# Altium PCB PWM_Controller_Half_Bridge_IR2110.PcbDoc
Units mm, origin at the board's own origin, x right, y up, seen from the top; angles counter-clockwise.
Board outline 60 x 30 mm, 2 copper layers (Top Layer, Bottom Layer), stack 1.071 mm thick; 68 components, 25 nets, 157 pads, 22 vias.
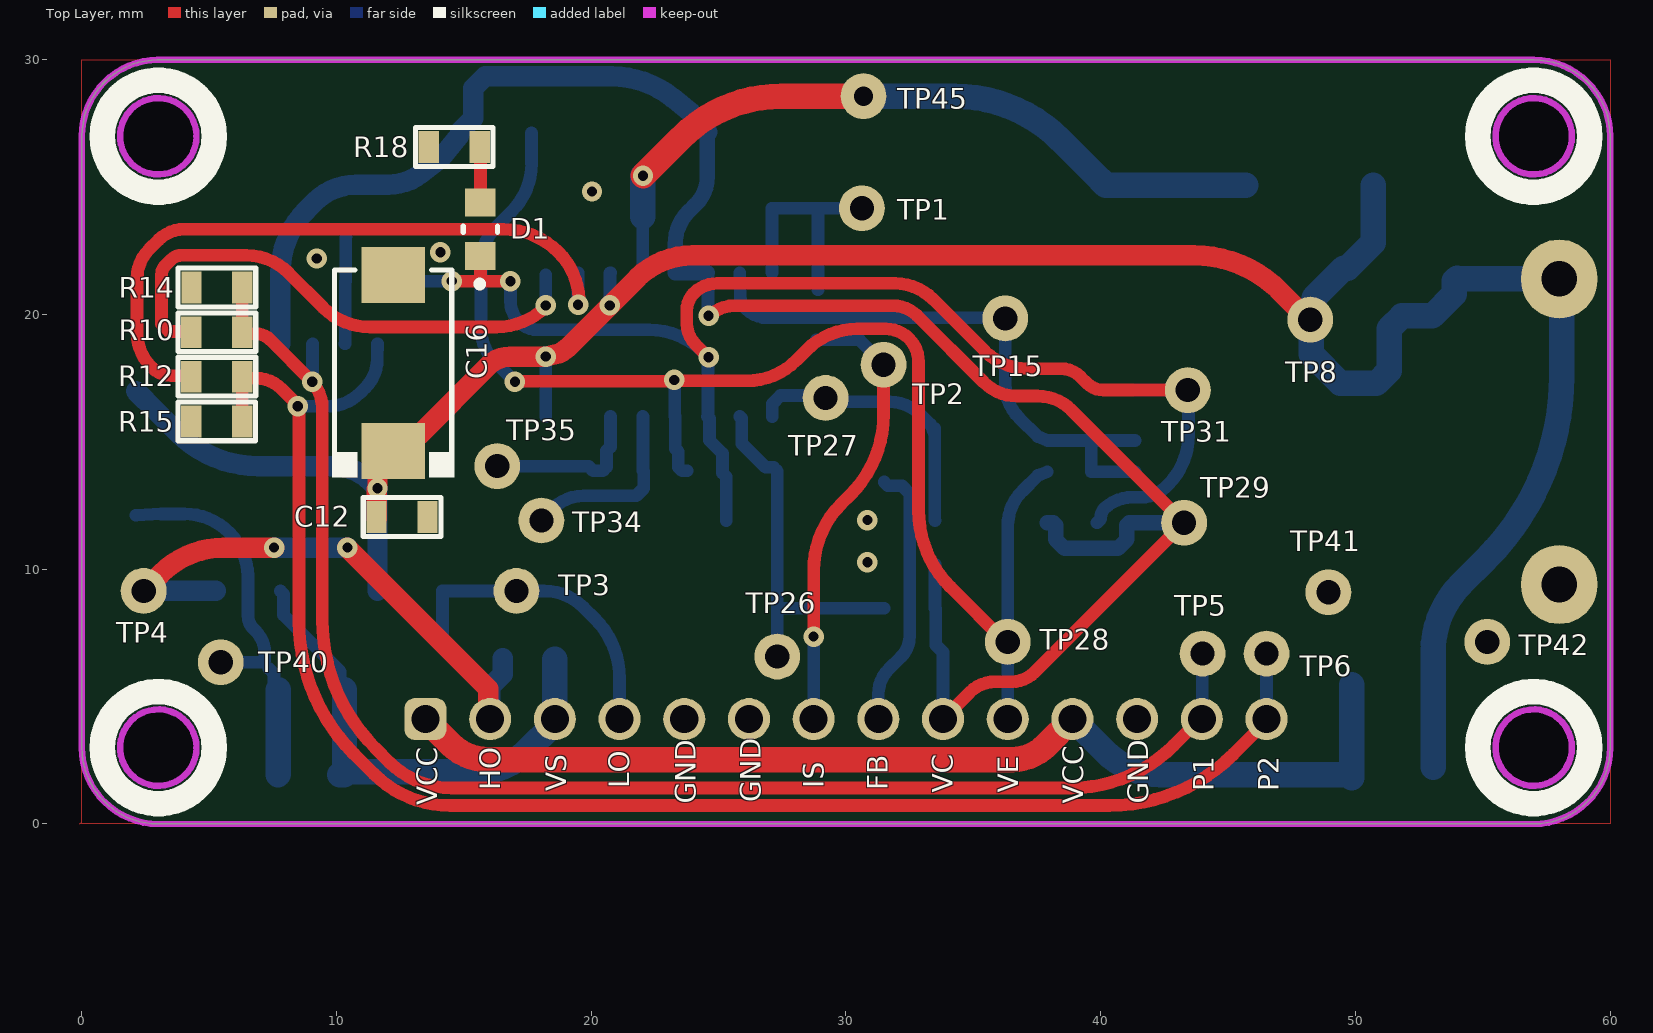
[diagram p0: Top Layer view]
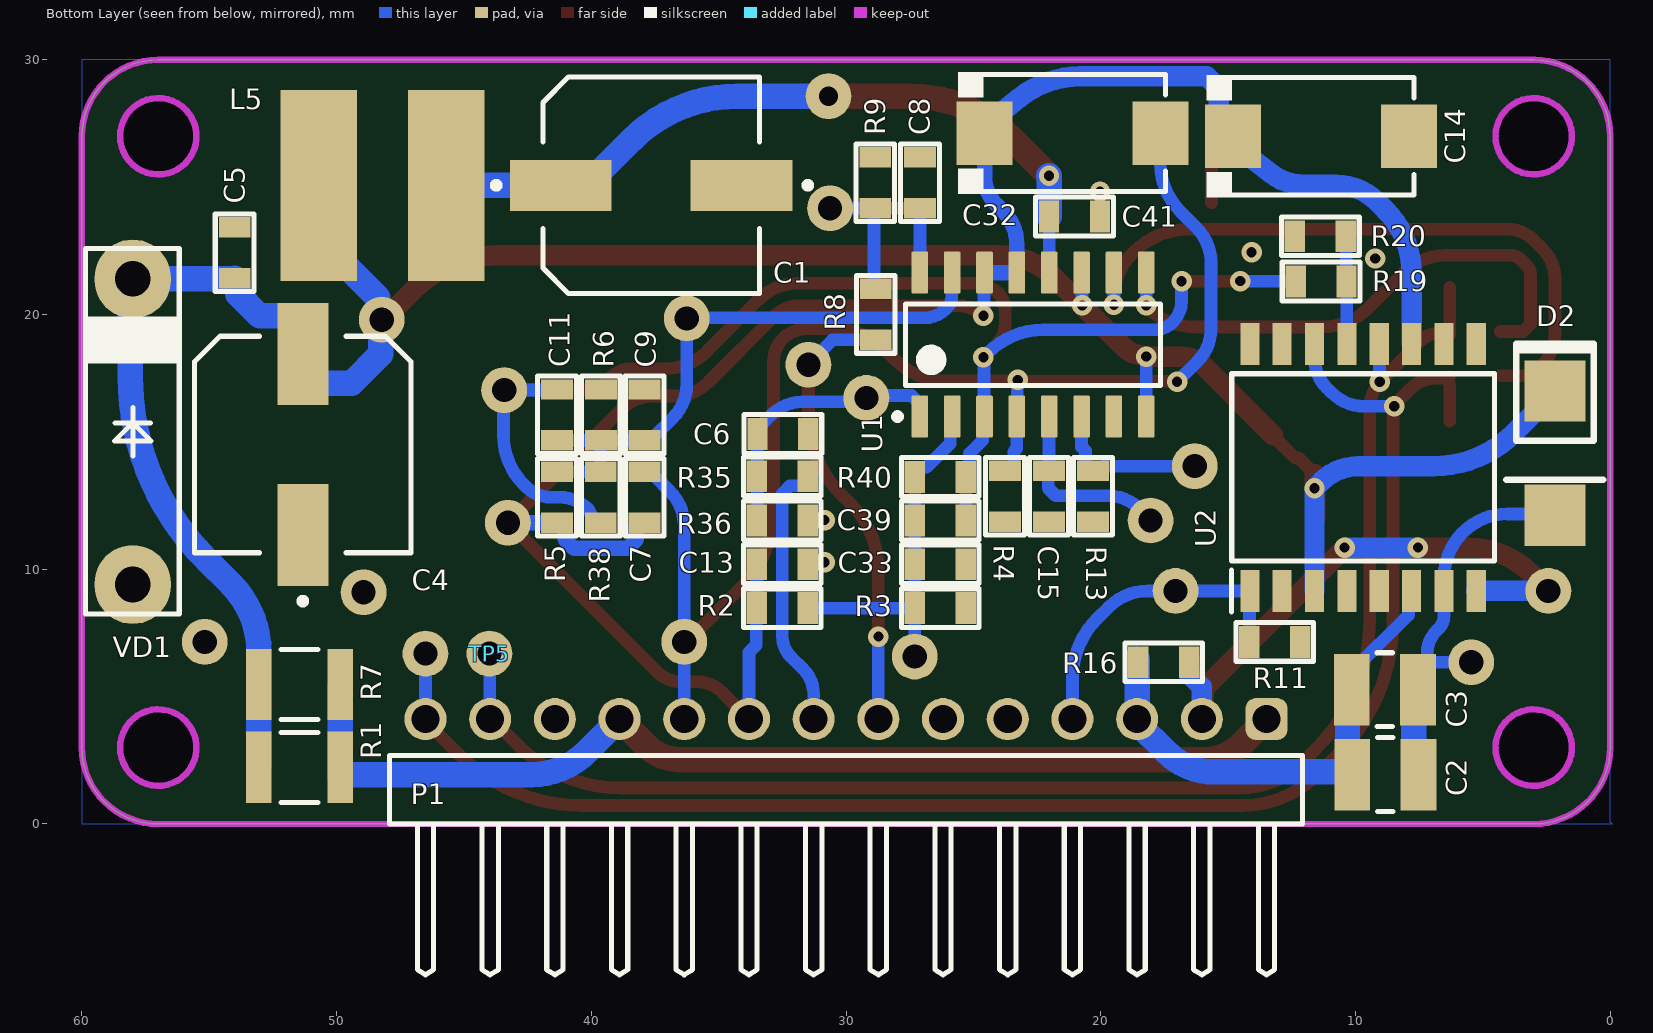
[diagram p1: Bottom Layer view, seen from below]
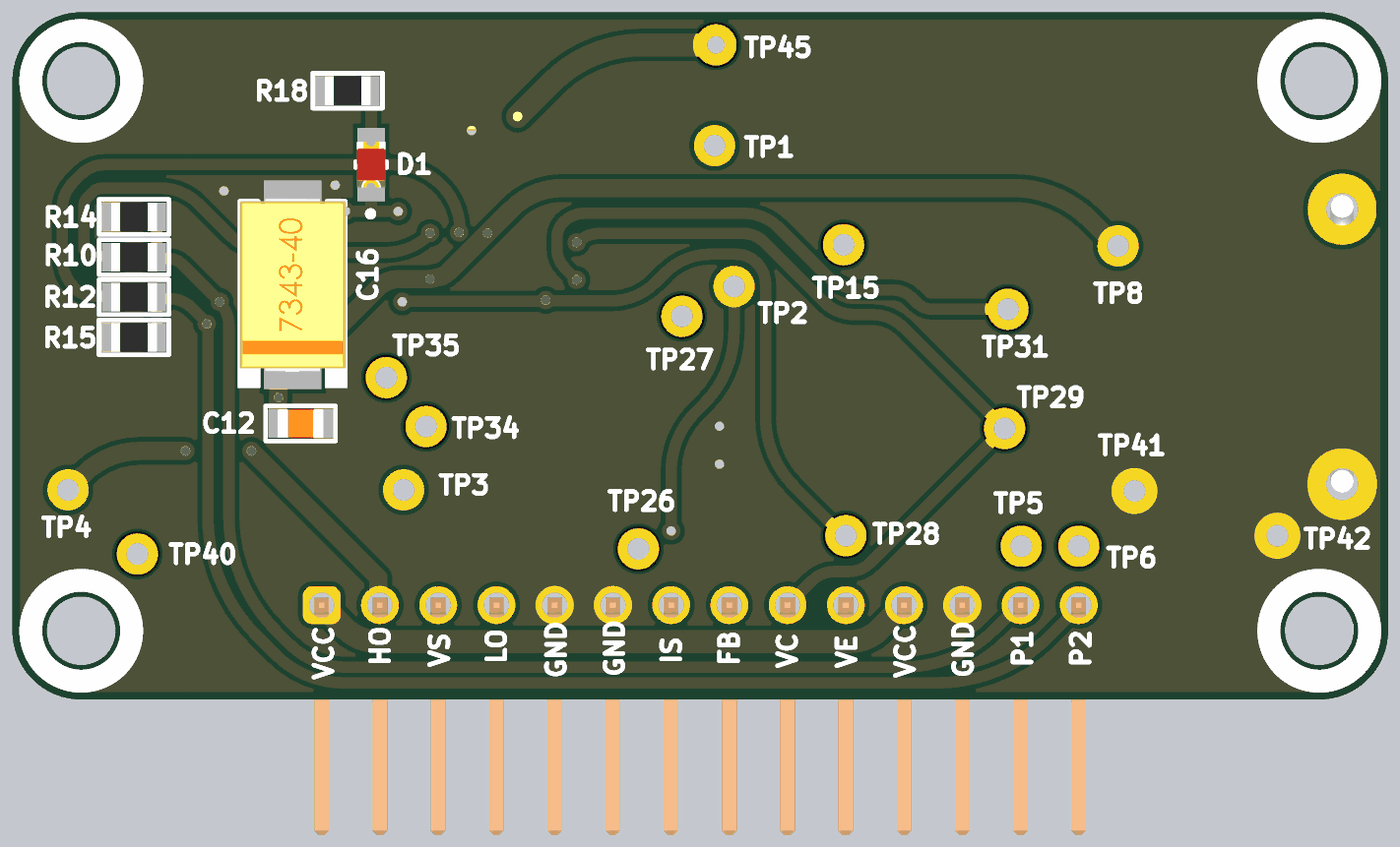
[diagram p2: 3D render of the assembled board from above, using the file's embedded part models]
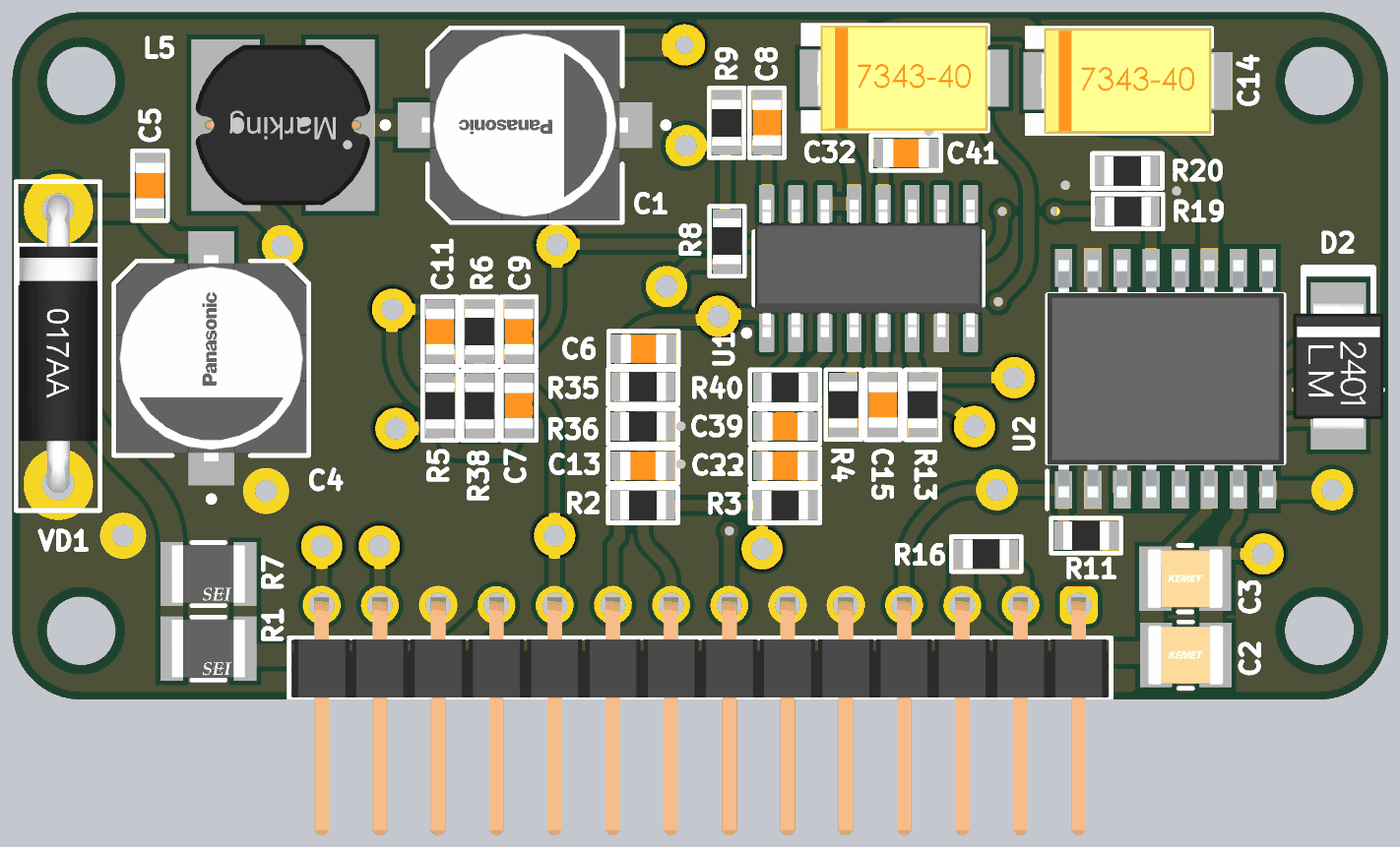
[diagram p3: 3D render of the assembled board from below, using the file's embedded part models]

## Layer stack, top to bottom
Top Solder: solder mask 0.0102, Solder Resist, Dk 3.5
Top Layer: signal copper 0.0356
Dielectric 1: dielectric 1, FR-4, Dk 4.8
Bottom Layer: signal copper 0.0356
Bottom Solder: solder mask 0.0102, Solder Resist, Dk 3.5

## Board outline
0,3 0,27 cw(c3,27) 3,30 2.963,30 57,30 cw(c57,27) 60,27 60,3.05 60,3 cw(c57,3) 57,0 2.999,0 3,0 cw(c3,3)
cut-out: 55.5,3 ccw(c57,3) 57,1.5 ccw(c57,3) 58.5,3 ccw(c57,3) 57,4.5 ccw(c57,3)
cut-out: 55.5,27 ccw(c57,27) 57,25.5 ccw(c57,27) 58.5,27 ccw(c57,27) 57,28.5 ccw(c57,27)
cut-out: 1.5,27 ccw(c3,27) 3,25.5 ccw(c3,27) 4.5,27 ccw(c3,27) 3,28.5 ccw(c3,27)
cut-out: 1.5,3 ccw(c3,3) 3,1.5 ccw(c3,3) 4.5,3 ccw(c3,3) 3,4.5 ccw(c3,3)

## Design rules (kind name [scope] priority, off if disabled: settings)
Clearance Clearance_1 [All vs InNet('GND_1')] p1: gap=0.2 ignorepadtopadclearanceinfootprint=FALSE
Clearance [All vs InNet('GND')] p2: gap=0.2 ignorepadtopadclearanceinfootprint=FALSE except(0.4: Fill-Fill Fill-Poly Fill-Region Fill-Text Fill-Hole Poly-Poly Poly-Region Poly-Text Poly-Hole Region-Region Region-Text Region-Hole)
ComponentClearance [All] p1: gap=-3 collisioncheckmode=3 verticalgap=0.254 showdistances=FALSE
DiffPairsRouting [All] p1: maxlimit=0.254 minlimit=0.254 mostfreqgap=0.254 substack1={A23D90DD-733B-49C5-8102-56B3D284E3A0} toplayer_{a23d90dd-733b-49c5-8102-56b3d284e3a0}_minwidth=0.381 toplayer_{a23d90dd-733b-49c5-8102-56b3d284e3a0}_maxwidth=0.381 toplayer_{a23d90dd-733b-49c5-8102-56b3d284e3a0}_prefwidth=0.381 bottomlayer_{a23d90dd-733b-49c5-8102-56b3d284e3a0}_minwidth=0.381 bottomlayer_{a23d90dd-733b-49c5-8102-56b3d284e3a0}_maxwidth=0.381 bottomlayer_{a23d90dd-733b-49c5-8102-56b3d284e3a0}_prefwidth=0.381 toplayer_minwidth=0.381 toplayer_maxwidth=0.381 toplayer_prefwidth=0.381 bottomlayer_minwidth=0.381 bottomlayer_maxwidth=0.381 bottomlayer_prefwidth=0.381 substack2={0B3DB408-A969-412D-8C07-BA8AE97219D9} toplayer_{0b3db408-a969-412d-8c07-ba8ae97219d9}_minwidth=0.381 toplayer_{0b3db408-a969-412d-8c07-ba8ae97219d9}_maxwidth=0.381 toplayer_{0b3db408-a969-412d-8c07-ba8ae97219d9}_prefwidth=0.381 bottomlayer_{0b3db408-a969-412d-8c07-ba8ae97219d9}_minwidth=0.381 bottomlayer_{0b3db408-a969-412d-8c07-ba8ae97219d9}_maxwidth=0.381 bottomlayer_{0b3db408-a969-412d-8c07-ba8ae97219d9}_prefwidth=0.381 substack3={378827E6-B38F-4565-9D2F-710D8D441C30} toplayer_{378827e6-b38f-4565-9d2f-710d8d441c30}_minwidth=0.381 toplayer_{378827e6-b38f-4565-9d2f-710d8d441c30}_maxwidth=0.381 toplayer_{378827e6-b38f-4565-9d2f-710d8d441c30}_prefwidth=0.381 bottomlayer_{378827e6-b38f-4565-9d2f-710d8d441c30}_minwidth=0.381 bottomlayer_{378827e6-b38f-4565-9d2f-710d8d441c30}_maxwidth=0.381 bottomlayer_{378827e6-b38f-4565-9d2f-710d8d441c30}_prefwidth=0.381 substack4={1E65D4A7-266F-4925-B814-5E9C4A66F8EE} toplayer_{1e65d4a7-266f-4925-b814-5e9c4a66f8ee}_minwidth=0.381 toplayer_{1e65d4a7-266f-4925-b814-5e9c4a66f8ee}_maxwidth=0.381 toplayer_{1e65d4a7-266f-4925-b814-5e9c4a66f8ee}_prefwidth=0.381 bottomlayer_{1e65d4a7-266f-4925-b814-5e9c4a66f8ee}_minwidth=0.381 bottomlayer_{1e65d4a7-266f-4925-b814-5e9c4a66f8ee}_maxwidth=0.381 bottomlayer_{1e65d4a7-266f-4925-b814-5e9c4a66f8ee}_prefwidth=0.381 substack5={93C5D03E-862D-45F8-9871-970EEA9B3F11} toplayer_{93c5d03e-862d-45f8-9871-970eea9b3f11}_minwidth=0.381 toplayer_{93c5d03e-862d-45f8-9871-970eea9b3f11}_maxwidth=0.381 toplayer_{93c5d03e-862d-45f8-9871-970eea9b3f11}_prefwidth=0.381 bottomlayer_{93c5d03e-862d-45f8-9871-970eea9b3f11}_minwidth=0.381 bottomlayer_{93c5d03e-862d-45f8-9871-970eea9b3f11}_maxwidth=0.381 bottomlayer_{93c5d03e-862d-45f8-9871-970eea9b3f11}_prefwidth=0.381 maxuncoupledlength=12.7
Height [All] p1: minheight=0 maxheight=50 prefheight=33
HoleSize [All] p1: absolutevalues=TRUE maxlimit=6 minlimit=0.01 maxpercent=80.000 minpercent=20.000
HoleToHoleClearance [All] p1: gap=0.1 allowstackedmicrovias=TRUE
MinimumSolderMaskSliver [All] p1: minsoldermaskwidth=0.1
PlaneClearance [All] p1: clearance=0.7
PlaneConnect [All] p1: planeconnectstyle=Direct reliefexpansion=0.5 reliefentries=4 reliefconductorwidth=0.5 reliefairgap=0.15
PolygonConnect VQFN20 [HasFootprint('VQFN20')] p1: connectstyle=Direct reliefconductorwidth=0.254 reliefentries=4 polygonreliefangle="90 Angle" airgapwidth=0.254
PolygonConnect [All] p2: connectstyle=Direct reliefconductorwidth=0.3 reliefentries=4 polygonreliefangle="90 Angle" airgapwidth=0.15
RoutingVias [All] p1: holewidth=0.1 width=0.1 viastyle="Through Hole" minholewidth=0 minwidth=0.3 maxholewidth=2 maxwidth=4
ShortCircuit [All] p1: allowed=TRUE
SilkToSolderMaskClearance [IsPad] p1: minsilkscreentomaskgap=0.1 clearancetoexposedcopper=TRUE
SolderMaskExpansion SolderMaskExpansion_Via [IsVia] p1: expansion=0.102 istentingtop=TRUE
SolderMaskExpansion [All] p2: expansion=0.01 istentingtop=FALSE
SupplyNets "Schematic Supply Nets" [InNet('GND')] p1: voltage=0.000
UnRoutedNet [All] p1: checkbadconnections=TRUE
Width [All] p1: maxlimit=5 minlimit=0.2 preferedwidth=0.3 substack1={A23D90DD-733B-49C5-8102-56B3D284E3A0} substack2={0B3DB408-A969-412D-8C07-BA8AE97219D9} substack3={378827E6-B38F-4565-9D2F-710D8D441C30} substack4={1E65D4A7-266F-4925-B814-5E9C4A66F8EE} substack5={93C5D03E-862D-45F8-9871-970EEA9B3F11}
19 further rules are at their usual default settings.

## Components (designator, comment, footprint, x,y, rotation, side; value= is the part's Value field where it differs from the comment)
C1 "CAP-POLAR" SIZE_EEE 37.65,25.075 r0 bottom
C2 "0.22uF" FP-C1210X475K5RACTU-IPC_C 8.825,1.939 r180 bottom
C3 "0.22uF" FP-C1210X475K5RACTU-IPC_C 8.848,5.275 r180 bottom
C4 "CAP-POLAR" SIZE_EEE 51.325,14.9 r90 bottom
C5 "0.1uF" CAP-0805 54,22.425 r270 bottom
C6 "CAP-NON-POLAR" CAP-0805 32.475,15.312 r0 bottom
C7 "CAP-NON-POLAR" CAP-0805 37.906,12.829 r270 bottom
C8 "CAP-NON-POLAR" CAP-0805 27.096,25.175 r270 bottom
C9 "CAP-NON-POLAR" CAP-0805 37.906,16.06 r270 bottom
C11 "2.2nF 16V" CAP-0805 41.35,16.06 r270 bottom
C12 "0.1uF" CAP-0805 12.57,12.05 r180 top
C13 "0.1uF" CAP-0805 32.498,10.2 r0 bottom
C14 "CAP-POLAR" CAP-TAN-D 11.348,27 r180 bottom
C15 "2.2nF 16V" CAP-0805 22.032,12.865 r90 bottom
C16 "CAP-POLAR" CAP-TAN-D 12.22,18.1 r90 top
C32 "CAP-POLAR" CAP-TAN-D 21.107,27.125 r180 bottom locked
C33 "CAP-NON-POLAR" CAP-0805 26.301,10.2 r0 bottom
C39 "2.2nF 16V" CAP-0805 26.301,11.916 r0 bottom
C41 "0.1uF" CAP-0805 21.028,23.85 r0 bottom
D1 "151031YS06000" LED_RED 15.646,23.35 r90 top
D2 "US1G" DO-214AA 2.167,12.5 r90 bottom
L5 "47µH, 1.17A" WE-PD2_7850 48.2,25.075 r0 bottom
P1 "61301411021" 61301411021 30,1.35 r180 bottom locked
R1 "51" FP-RMCF1210-MFG 51.45,2.225 r180 bottom
R2 "10K**" RES-0805 32.498,8.475 r180 bottom
R3 "2K" RES-0805 26.3,8.475 r180 bottom
R4 "10K" RES-0805 23.757,12.868 r270 bottom
R5 "2K**" RES-0805 41.35,12.829 r90 bottom
R6 "2K" RES-0805 39.625,16.06 r90 bottom
R7 "51" FP-RMCF1210-MFG 51.45,5.475 r180 bottom
R8 "2K" RES-0805 28.833,20.007 r90 bottom
R9 "30K" RES-0805 28.85,25.175 r270 bottom
R10 "2K" RES-0805 5.302,19.305 r0 top
R11 "10K" RES-0805 13.17,7.15 r180 bottom
R12 "2K" RES-0805 5.302,17.561 r0 top
R13 "10K" RES-0805 20.301,12.865 r270 bottom
R14 "1K" RES-0805 5.302,21.063 r180 top
R15 "1K" RES-0805 5.3,15.807 r180 top
R16 "10K" RES-0805 17.525,6.35 r0 bottom
R18 "330" RES-0805 14.62,26.575 r0 top
R19 "10K*" RES-0805 11.348,21.3 r180 bottom
R20 "10K*" RES-0805 11.375,23.075 r180 bottom
R35 "47K**" RES-0805 32.498,13.65 r0 bottom
R36 "2K" RES-0805 32.498,11.916 r180 bottom
R38 "1M" RES-0805 39.626,12.829 r270 bottom
R40 "1M" RES-0805 26.301,13.627 r180 bottom
TP1 "" Test_Point#1 30.625,24.175 r0 top
TP2 "" Test_Point#2 31.475,18.029 r0 top
TP3 "" Test_Point#2 17.061,9.15 r0 top
TP4 "" Test_Point#2 2.426,9.15 r0 top
TP5 "" Test_Point#3 44,6.691 r180 bottom
TP6 "" Test_Point#3 46.51,6.691 r0 top
TP8 "" Test_Point#1 48.225,19.8 r0 top
TP15 "" Test_Point#3 36.251,19.85 r0 top
TP26 "" Test_Point#3 27.301,6.575 r0 top
TP27 "" Test_Point#3 29.2,16.727 r0 top
TP28 "" Test_Point#3 36.35,7.15 r90 top
TP29 "" Test_Point#3 43.275,11.829 r90 top
TP31 "" Test_Point#3 43.421,17.035 r90 top
TP34 "" Test_Point#3 18.042,11.916 r90 top
TP35 "" Test_Point#3 16.308,14.05 r180 top
TP40 "" Test_Point#3 5.45,6.35 r90 top
TP41 "" Test_Point#3 48.939,9.1 r0 top
TP42 "" Test_Point#3 55.175,7.15 r0 top
TP45 "" Test_Point#4 30.687,28.575 r90 top
U1 "TL494" SOIC-16-M 22.657,18.821 r90 bottom locked
U2 "IR2110S" SOIC127P1036X391-16N 9.7,14 r90 bottom
VD1 "12V" DO-017AA 58,15.4 r270 bottom

## Footprints (in the part's own frame and the unit in brackets; to place one, negate y for a bottom-side part, rotate by r counter-clockwise, add the part's x,y. Pads: shape width x height; smd on the part's side, far side on the other; paste and mask are expansions set on the pad)
61301411021 [mm] "Pin Header, pitch 2.54 mm, THT, Angled, single row, 14p"
  rrect50% 1.65x1.65 hole 1.1: 1(16.51,2.77)
  round 1.65 hole 1.1: 2(13.97,2.77) 3(11.43,2.77) 4(8.89,2.77) 5(6.35,2.77) 6(3.81,2.77) 7(1.27,2.77) 8(-1.27,2.77) 9(-3.81,2.77) 10(-6.35,2.77) 11(-8.89,2.77) 12(-11.43,2.77) 13(-13.97,2.77) 14(-16.51,2.77)
  silkscreen extent -17.93,-7.27 17.93,1.35, body extent -17.78,-7.27 17.78,3.09, height 2.58
CAP-0805 [mm]
  rect 0.8x1.25 smd mask+0.015: 1(-1,0) 2(1,0)
  silkscreen extent -1.52,-0.76 1.52,0.76, body extent -1,-0.62 1,0.63, height 0.8
CAP-TAN-D [mm]
  rect 2.2x2.5 smd: 1(-3.45,0) 2(3.45,0)
  silkscreen extent -4.5,-2.4 3.65,2.4, body extent -3.8,-2.3 3.8,2.3, height 4
DO-017AA [mm]
  oval 3.1x3 hole 1.4: 1(-6,0) 2(6,0)
  silkscreen extent -7.2,-1.85 7.15,1.83, body extent -6.63,-1.7 6.37,1.7, height 3.4
DO-214AA [mm]
  rect 2.4x2.4 smd: 1(-0.381,0) 2(4.5,0)
  silkscreen extent 1.02,-1.91 6.35,1.91, body extent -0.75,-1.97 4.85,1.97, height 2.65
FP-C1210X475K5RACTU-IPC_C [mm]
  rect 1.403x2.804 smd paste+0 mask+0: 1(-1.3,0) 2(1.3,0)
  silkscreen extent -0.3,-1.45 0.3,1.45, body extent -1.65,-1.3 1.65,1.3, height 2.8
FP-RMCF1210-MFG [mm]
  rect 1x2.8 smd paste+0 mask+0: 1(-1.6,0) 2(1.6,0)
  silkscreen extent -0.72,-1.38 0.72,1.38, body extent -1.6,-1.25 1.6,1.25, height 0.7
LED_RED [mm]
  rect 1.1x1.2 smd paste+0 mask+0: 1(-1.05,0) 2(1.05,0)
  silkscreen extent -2.27,-0.67 0.13,0.67, body extent -1.7,-0.77 1.7,0.77, height 0.25
RES-0805 [mm]
  rect 0.8x1.25 smd mask+0.015: 1(-1,0) 2(1,0)
  silkscreen extent -1.52,-0.76 1.52,0.76, body extent -1,-0.62 1,0.63, height 0.6
SIZE_EEE [mm]
  rect 4x2 smd paste+0 mask+0: 1(3.55,0) 2(-3.55,0)
  silkscreen extent -6.27,-4.25 4.25,4.25, body extent -4.5,-4.15 4.5,4.15, height 6.5
SOIC127P1036X391-16N [mm]
  rect 1.65x0.75 smd: 1(-4.85,4.445) 2(-4.85,3.175) 3(-4.85,1.905) 4(-4.85,0.635) 5(-4.85,-0.635) 6(-4.85,-1.905) 7(-4.85,-3.175) 8(-4.85,-4.445) 9(4.85,-4.445) 10(4.85,-3.175) 11(4.85,-1.905) 12(4.85,-0.635) 13(4.85,0.635) 14(4.85,1.905) 15(4.85,3.175) 16(4.85,4.445)
  silkscreen extent -5.68,-5.16 3.67,5.17, body extent -5.18,-5.16 5.18,5.16, height 3.91
SOIC-16-M [mm]
  rrect15% 1.65x0.65 smd: 1(-2.825,4.445) 2(-2.825,3.175) 3(-2.825,1.905) 4(-2.825,0.635) 5(-2.825,-0.635) 6(-2.825,-1.905) 7(-2.825,-3.175) 8(-2.825,-4.445) 9(2.825,-4.445) 10(2.825,-3.175) 11(2.825,-1.905) 12(2.825,-0.635) 13(2.825,0.635) 14(2.825,1.905) 15(2.825,3.175) 16(2.825,4.445)
  silkscreen extent -2.95,-5 1.6,5.45, body extent -3,-4.95 3,4.95, height 1.59
Test_Point#1 [mm]
  round 1.8 / inner round 2.5 / far side round 1.8 hole 0.95: 1(0,0)
Test_Point#2 [mm]
  round 1.8 hole 0.95: 1(0,0)
Test_Point#3 [mm]
  round 1.8 / inner round 2.286 / far side round 1.8 hole 0.95 paste-2539.97 mask+0.102: 1(0,0)
Test_Point#4 [mm]
  round 1.8 / inner round 2.286 / far side round 1.8 hole 0.762 paste-2539.97 mask+0.102: 1(0,0)
WE-PD2_7850 [mm] "SMD Power Inductor, 2-Leads, body 7.8x7mm"
  rect 3x7.5 smd: 1(-2.5,0) 2(2.5,0)
  silkscreen extent -4.59,-0.12 -4.34,0.12, body extent -3.81,-3.5 3.81,3.5, height 4.95

## Part data
C2 C3: library part CAP_1210
C5 C11 C12 C13 C15 C39 C41: library part CAP-NON-POLAR
D1: library part LED, "WURTH ELEKTRONIK - 151031YS06000 - LED, Yellow, Through Hole, T-1 (3mm), 30 mA, 2 V, 590 nm", Manufacturer_Name="Wurth Elektronik", Mouser Part Number=710-151031YS06000, Datasheet Link=https://katalog.we-online.de/led/datasheet/151031YS06000.pdf, Geometry.Height=5.5mm, Manufacturer_Part_Number=151031YS06000, Mouser Price/Stock=https://www.mouser.co.uk/ProductDetail/Wurth-Elektronik/151031YS06000?qs=LlUlMxKIyB3xSYYW%252BcuBiQ%3D%3D
L5: library part 744775147, "WE-PD2 SMT Power Inductor, size 7850, 47µH, 1.17A, 0.18Ω", Case/Size Code=7850, DC Resistance=0.134Ω, DC Resistance Max=0.18Ω, Inductance=47µH, Manufacturer="Wurth Elektronik", Operating Temperature Max=125°C, Operating Temperature Min=-40°C, Rated Current=1.17A, Saturation Current=1.24A, Self Resonant Frequency=12MHz, Category="Unshielded Power Inductors", ComponentLink1Description="Website Link", ComponentLink1URL=https://www.we-online.com/redexpert/article/744775147?ad, ComponentLink2Description="Datasheet Link", ComponentLink2URL=https://www.we-online.com/redexpert/spec/744775147?ad, Height=4.95mm, Length=7.8mm, Manufacturer Part Number=744775147, Match Code=WE-PD2, Mount="Surface Mount", Packaging="Tape and Reel", Width=7mm, Simulation ModelName=7850_744775147_47u, Simulation ModelText=".subckt 7850_744775147_47u 1 2 / Rp 1 2 40000 / Cp 1 2 4p / Rs 1 N3 0.1343 / L1 N3 2 47u / .ends 7850_744775147_47u", Simulation PortMap=(1:1),(2:2)
P1: "WR-PHD Pin Header, THT, Angled, pitch 2.54mm, 1 Row, 14P", Contact Resistance=20mΩ, Manufacturer="Wurth Elektronik", Operating Temperature Max=105°C, Operating Temperature Min=-40°C, Rated Current=3A, Withstanding Voltage=500V, Working Voltage=250V, Category="Board-to-Board Connectors", ComponentLink1Description="Website Link", ComponentLink1URL=https://www.we-online.com/redexpert/article/61301411021?ad, ComponentLink2Description="Datasheet Link", ComponentLink2URL=https://www.we-online.com/redexpert/spec/61301411021?ad, Gender="Pin Header", Manufacturer Part Number=61301411021, Match Code=WR-PHD, Mount="Through Hole", Number of Pins=14, Number of Rows=1, Orientation=Angled, Packaging=Bag, Pitch=2.54mm
R1 R7: library part CMP-26527-006785-1, "51Ω ±5% 0.5W 1210 Thick Film Chip Resistor AEC-Q200 compliant", Case Code (Imperial)=1210, Case Code (Metric)=3225, Max Operating Temperature=155°C, Max Power Dissipation=500mW, Min Operating Temperature=-55°C, Resistance=51R, Resistor Type="Thick Film", Temperature Coefficient=200ppm/°C, Tolerance=5%, Case/Package=1210, Contact Plating=Tin, Features="Automotive AEC-Q200", Height=0.028inch, Lead Free="Lead Free", Length=0.126inch, Mount="Surface Mount", Number of Terminations=2, Packaging="Tape and Reel", Radiation Hardening=No, RoHS Compliant=Yes, Series=RMCF, Width=0.098inch
R2 R19 R20: library part RES-CONST, "10K"
R3 R4 R6 R8 R9 R10 R11 R12 R13 R14 R15 R16 R18 R36 R38 R40: library part RES-CONST
R5: library part RES-CONST, "2K"
R35: library part RES-CONST, "47K"
TP1 TP2 TP3 TP4 TP5 TP6 TP8 TP15 TP26 TP27 TP28 TP29 TP31 TP34 TP35 TP40 TP41 TP42 TP45: library part TP_PCB?, "Test_Point"
U1: "TL494 Pwm controller"
U2: "IC DRIVER HIGH/LOW SIDE 16-SOIC", Manufacturer_Name=Infineon, Datasheet Link=https://www.infineon.com/dgdl/ir2110.pdf?fileId=5546d462533600a4015355c80333167e, Geometry.Height=2.65mm, Manufacturer_Part_Number=IR2110S
VD1: library part ZENER

## Via types
v1: diameter 0.8, hole 0.4, Top Layer to Bottom Layer, tented both sides, 22 vias

## Nets (pads, with @x,y where several pads share a name; then routed paths per layer and width w, separated by ;. In a path a pad name is that pad's centre, name@x,y a point inside that pad or via, vN(x,y) a via of type N, cw(c..) or ccw(c..) an arc to the next point about the centre after c; other vN are vias at no path point)
GND: C1.2 C4.2 C5.1 C6.1 C8.1 C9.1 C12.1 C13.1 C14.2 C15.1 C16.2 C33.1 C41.1 P1.5 P1.6 P1.12 R3.2 R4.2 R6.2 R9.1 R11.2 R13.2 R14.2 R15.2 R18.1 R20.1 R36.2 TP41.1 TP42.1 U1.7 U2.2 U2.15 VD1.2
  other v1: 30.839,10.273 30.839,11.929 9.225,22.2 14.075,22.45 20.028,24.832
NetC1_1: C1.1 C41.2 L5.1 TP45.1 U1.12 | length 29.7
  Top Layer w1: v1@22.032,25.45 23.523,26.941 cw(c27.467,22.999) 27.467,28.575 TP45.1
  Bottom Layer w0.5: U1.12 22.025,21.649 22.025,23.846 C41.2
  Bottom Layer w1: C41.2 22.028,25.446 v1(22.032,25.45) ; TP45.1 34.263,28.575 cw(c34.263,22.691) 38.421,26.854 39.7,25.575 40.2,25.075 C1.1 L5.1
NetC2_1: C2.1 C3.1 P1.3 R16.2 U2.6 | length 20
  Bottom Layer w0.5: U2.6 7.92,9.025 7.92,8.204 10.148,5.976 C3.1
  Bottom Layer w1: C3.1@10.312,5.264 10.312,1.951 10.3,1.939 C2.1 10.222,1.939 10.327,2.044 15.542,2.044 15.544,2.044 ccw(c15.544,4.695) 17.419,2.82 18.57,3.971 P1.3 18.573,4.122 18.573,6.472 R16.2@18.575,6.475
NetC2_2: C2.2 C3.2 D2.1 TP40.1 U2.7 | length 15.3
  Bottom Layer w0.5: D2.1@2.125,12.119 3.117,12.175 4.029,12.175 cw(c4.026,9.7) 5.775,11.451 cw(c3.96,9.638) 6.524,9.725 U2.7 6.525,8.575 6.525,8.166 ccw(c7.229,8.166) 6.731,7.669 6.816,7.584 cw(c5.929,6.698) 7.183,6.698 7.183,6.427 7.106,6.35 5.525,6.35 TP40.1@5.475,6.4 ; C3.2@7.341,6.105 7.548,5.899 C3.2
  Bottom Layer w1: C2.2@7.7,1.939 7.711,1.951 C3.2@7.711,5.264
NetC4_1: C4.1 C5.2 C12.2 C16.1 D2.2 L5.2 R1.1 R7.1 TP8.1 U1.8 U1.11 U2.3 VD1.1 | length 102.6
  Top Layer w0.5: C16.1@11.575,13.725 12.225,14.375 12.375,14.375 13.225,15.225 C16.1@13.225,15.252
  Top Layer w0.8: C12.2@11.575,11.975 11.575,13.15 v1(11.605,13.18) 11.605,13.695 C16.1@11.575,13.725 ; C16.1@13.225,15.252 15.977,18.004 cw(c16.813,17.168) 16.813,18.35 v1(18.212,18.35) 18.739,18.47 ccw(c18.212,19.561) 19.068,18.704 21.777,21.414 cw(c23.978,19.213) 23.978,22.325 23.98,22.325 43.664,22.325 cw(c43.664,17.592) 47.009,20.941 TP8.1@48.15,19.8
  Bottom Layer w0.5: U1.8 v1(18.212,18.35) ; v1(20.725,20.361) 20.739,20.375 20.739,21.632 U1.11
  Bottom Layer w0.8: D2.2@2.125,17 2.925,16.2 3.769,15.356 ccw(c6.926,18.518) 6.926,14.05 6.928,14.05 9.768,14.05 9.866,14.05 cw(c9.866,11.953) 11.349,13.436 v1(11.605,13.18) U2.3
  Bottom Layer w1: L5.2 50.7,22.825 49.7,21.825 49.544,21.825 48.378,20.659 48.378,19.953 TP8.1 48.265,19.76 48.265,18.446 49.411,17.3 50.825,17.3 51.325,17.8 C4.1@51.325,19.369 ; C4.1@51.325,19.45 51.825,19.95 53.025,19.95 53.875,20.8 53.875,21.325 53.9,21.325 C5.2 ; R1.1 53.05,6.375 53.05,6.757 cw(c56.843,6.754) 54.162,9.437 55.135,10.41 ccw(c47.984,17.565) 58.1,17.565 58.1,21.3 VD1.1 57.988,21.412 C5.2@54,21.412
NetC6_2: C6.2 R35.2 R36.1 TP27.1 U1.1 | length 11.3
  Bottom Layer w0.5: U1.1 27.102,16.496 27.427,16.821 29.106,16.821 29.352,16.575 31.711,16.575 cw(c31.711,14.866) 32.919,16.075 33.307,15.687 33.325,15.687 C6.2 ; C6.2@33.487,15.525 33.487,13.65 33.487,11.928 R36.1
NetC7_1: C7.1 C32.2 P1.10 R4.1 TP28.1 U1.4 | length 54.7
  Top Layer w0.5: v1(17,17.363) 17.018,17.382 23.206,17.382 v1(23.259,17.435) 23.294,17.4 26.108,17.4 26.109,17.4 ccw(c26.109,20.143) 28.05,18.205 28.466,18.62 cw(c30.439,16.65) 30.439,19.439 31.559,19.439 31.562,19.439 cw(c31.561,18.158) 32.464,19.066 cw(c31.54,18.138) 32.85,18.138 32.85,12.317 32.85,12.315 ccw(c37.109,12.315) 34.099,9.302 36.251,7.15 TP28.1
  Bottom Layer w0.5: v1(17,17.363) 16.201,18.163 cw(c17.479,19.441) 15.671,19.441 15.671,19.444 15.671,22.021 15.671,22.022 cw(c17.66,22.022) 16.255,23.43 16.882,24.057 ccw(c15.014,25.927) 17.657,25.927 C32.2 ; v1(23.259,17.435) 23.276,17.419 23.276,16.012 U1.4 23.292,14.738 23.417,14.613 23.417,14.018 23.567,13.868 R4.1 ; P1.10 TP28.1 36.35,11.695 36.35,11.696 cw(c38.286,11.696) 36.917,13.065 37.531,13.679 C7.1
NetC7_2: C7.2 C13.2 C14.1 C32.1 P1.9 R2.1 R5.1 TP29.1 U1.13 U1.14 U2.11 | length 81.1
  Top Layer w0.5: v1@24.653,19.953 v1(24.607,19.953) 24.857,20.12 cw(c25.611,18.995) 25.611,20.35 31.849,20.35 cw(c31.849,19.018) 32.791,19.96 32.792,19.958 35.407,17.344 35.41,17.341 ccw(c36.716,18.648) 36.716,16.8 36.718,16.8 37.521,16.8 cw(c37.521,14.91) 38.858,16.247 38.86,16.245 TP29.1 37.402,5.957 cw(c36.513,6.844) 36.513,5.588 36.512,5.588 35.866,5.588 35.864,5.588 ccw(c35.864,4.173) 34.863,5.173 P1.9
  Bottom Layer w0.5: U1.14 24.585,21.623 24.585,19.976 v1(24.607,19.953) ; C13.2 R2.1 33.525,8.448 33.525,7.025 33.81,6.74 P1.9
  Bottom Layer w0.6: C32.1 24.557,26.175 24.557,25.401 cw(c23.063,25.401) 24.119,24.344 23.826,24.051 ccw(c25.113,22.763) 23.292,22.764 23.292,22.171 U1.13 U1.14 ; C7.2 38.131,11.829 38.231,11.729 38.231,11.176 38.583,10.825 40.673,10.825 41.025,11.176 41.025,11.729 41.125,11.829 R5.1 TP29.1
  Bottom Layer w0.8: U2.11 7.795,21.623 7.795,21.625 cw(c11.313,21.625) 8.826,24.114 9.135,24.422 cw(c10.772,22.785) 10.772,25.1 10.774,25.1 12.034,25.1 12.036,25.1 ccw(c12.036,27.181) 13.316,25.54 14.098,26.15 C14.1 ; C14.1@14.85,27.199 15.364,27.714 15.364,28.881 15.833,29.35 20.809,29.35 cw(c20.809,25.554) 20.811,29.35 cw(c20.809,25.554) 23.185,28.514 23.857,27.975 C32.1@24.557,27.166
NetC8_2: C8.2 R8.2 R9.2 TP1.1 U1.16 | length 9.3
  Bottom Layer w0.5: U1.16 27.099,21.649 27.099,24.172 C8.2 TP1.1 ; R9.2 28.9,24.125 R8.2@28.9,20.975
NetC9_2: C9.2 C11.2 R5.2 R6.1 R38.1 TP15.1 U1.15 | length 23.5
  Bottom Layer w0.5: U1.15 25.844,21.071 25.853,20.657 25.854,20.602 ccw(c26.462,20.712) 26.025,20.275 26.091,20.209 ccw(c26.898,21.016) 26.898,19.875 26.899,19.875 36.226,19.875 TP15.1 ; TP15.1@36.193,19.71 36.193,19.427 36.25,19.37 36.25,17.267 36.25,17.264 ccw(c38.121,17.266) 36.798,15.943 37.531,15.21 C9.2 R6.1 C11.2 ; R38.1@39.625,13.83 R6.1 ; R38.1 R5.2
NetC11_1: C11.1 C39.1 D1.1 R19.1 R38.2 R40.2 TP31.1 U1.3 | length 55
  Top Layer w0.5: v1(14.525,21.313) 14.528,21.31 15.646,21.31 ; D1.1 15.646,21.31 ; v1(16.825,21.307) 16.822,21.31 15.646,21.31 ; v1(24.607,18.321) 24.077,18.851 cw(c24.872,19.643) 23.75,19.645 23.75,20.155 cw(c24.735,20.155) 24.038,20.851 cw(c24.941,19.948) 24.941,21.225 24.943,21.225 31.921,21.225 cw(c31.92,19.112) 33.413,20.607 35.452,18.567 ccw(c37.124,20.239) 37.126,17.875 38.438,17.875 cw(c38.438,16.783) 39.209,17.556 39.459,17.306 ccw(c40.114,17.961) 40.113,17.035 TP31.1
  Bottom Layer w0.5: R19.1 12.355,21.307 14.518,21.307 v1(14.525,21.313) ; v1(16.825,21.307) 16.825,20.536 ccw(c18.005,20.537) 17.172,19.701 ccw(c17.902,20.434) 17.902,19.4 17.904,19.4 22.264,19.4 cw(c22.264,16.347) 24.422,18.506 v1(24.607,18.321) 24.585,18.298 24.585,16.018 U1.3 24.637,15.921 24.637,15.063 25.151,14.549 25.151,13.777 R40.2 C39.1 ; R38.2@39.851,11.829 40.001,11.979 40.001,12.041 cw(c40.501,12.04) 40.162,12.407 cw(c41.246,11.228) 41.246,12.829 41.247,12.829 41.578,12.829 41.579,12.829 ccw(c41.579,14.207) 42.554,13.234 42.643,13.323 ccw(c40.697,15.27) 43.45,15.27 TP31.1@43.45,17.06 ; C11.1@41.375,17.035 TP31.1
NetC15_2: C15.2 TP34.1 U1.5 | length 7.3
  Bottom Layer w0.5: TP34.1 18.042,11.944 18.474,12.376 cw(c19.708,11.142) 19.708,12.887 21.764,12.887 22.057,13.18 22.057,13.84 C15.2 22.027,13.87 22.027,15.991 U1.5
NetC33_2: C33.2 C39.2 R2.2 R3.1 R40.1 TP26.1 U1.2 | length 14.4
  Bottom Layer w0.5: U1.2 25.907,15.921 25.907,14.942 26.847,14.002 27.151,14.002 27.301,13.852 R40.1 ; TP26.1@27.301,6.576 R3.1 ; R40.1@27.301,13.627 27.301,11.916 27.301,10.2 R3.1@27.301,8.476 ; R2.2 R3.1
NetD1_2: D1.2 R18.2 | length 2.2
  Top Layer w0.5: R18.2 15.646,26.549 D1.2
NetP1_1: P1.1 P1.11 R1.2 R7.2 | length 42.2
  Top Layer w1: P1.1 13.815,3.795 14.482,3.128 ccw(c15.94,4.589) 15.94,2.525 36.522,2.525 ccw(c36.52,4.395) 36.523,2.525 ccw(c36.52,4.395) 37.843,3.073 P1.11
  Bottom Layer w1: P1.11 40.17,2.84 ccw(c42.347,5.021) 42.347,1.939 49.85,1.939 R1.2 ; R1.2@49.85,1.825 R7.2
NetP1_2: P1.2 R16.1 TP4.1 U2.8 | length 23
  Top Layer w0.8: TP4.1 3.107,9.831 cw(c5.567,7.37) 5.567,10.85 5.569,10.85 v1(7.548,10.85) ; v1(10.425,10.85) 15.961,5.314 15.961,4.189 P1.2
  Bottom Layer w0.8: TP4.1 U2.8 ; v1(7.548,10.85) v1(10.425,10.85) ; P1.2 16.032,4.122 16.032,5.382 16.525,5.875 R16.1 R16.1@16.525,6.507
NetP1_4: P1.4 R11.1 TP3.1 U2.1 | length 12.6
  Bottom Layer w0.5: R11.1 14.157,7.162 14.157,9.138 U2.1 TP3.1 18.14,9.15 cw(c18.14,6.954) 19.693,8.507 19.695,8.505 20.144,8.056 20.147,8.053 cw(c17.821,5.727) 21.11,5.728 21.11,5.726 P1.4
NetP1_7: P1.7 R8.1 TP2.1 | length 17.6
  Top Layer w0.5: v1(28.73,7.358) 28.73,9.955 28.73,9.957 cw(c32.407,9.957) 29.809,12.559 30.165,12.915 ccw(c27.008,16.075) 31.475,16.075 31.475,16.077 TP2.1
  Bottom Layer w0.5: P1.7 v1(28.73,7.358) ; R8.1 30.532,19.007 31.239,18.3 TP2.1@31.425,18.3
NetP1_8: P1.8 R35.1 | length 10.4
  Bottom Layer w0.5: P1.8 31.27,5.102 cw(c32.644,5.101) 31.673,6.073 32.154,6.554 ccw(c31.328,7.383) 32.498,7.383 32.498,12.982 32.205,13.275 31.648,13.275 R35.1@31.498,13.425
NetP1_13: P1.13 R10.2 R14.1 TP5.1 U2.12 | length 58.3
  Top Layer w0.5: R10.2@6.302,19.221 R14.1 ; R10.2 6.452,19.246 6.833,19.246 cw(c6.833,18.458) 7.39,19.015 v1(9.042,17.363) 9.207,17.118 cw(c8.08,16.357) 9.44,16.357 9.44,15.991 9.44,8.016 9.44,8.014 ccw(c16.568,8.013) 11.528,2.972 12.082,2.418 ccw(c14.512,4.849) 14.517,1.412 38.822,1.412 38.824,1.412 ccw(c38.824,7.116) 42.857,3.082 43.895,4.12 P1.13
  Bottom Layer w0.5: v1(9.042,17.363) 9.053,17.375 9.053,18.838 U2.12 ; P1.13 43.985,4.135 43.985,6.676 TP5.1
NetP1_14: P1.14 R12.2 R15.1 TP6.1 U2.14 | length 63.2
  Top Layer w0.5: R15.1 R15.1@6.3,16.189 ; R15.1@6.301,16.182 R12.2@6.301,17.243 ; R12.2 6.452,17.5 6.842,17.5 cw(c6.842,16.093) 7.837,17.088 8.475,16.45 v1(8.475,16.4) 8.525,16.35 8.525,7.962 8.525,7.959 ccw(c15.887,7.959) 10.681,2.754 10.683,2.752 11.473,1.962 11.476,1.959 ccw(c14.456,4.939) 14.456,0.725 14.457,0.725 40.338,0.725 40.34,0.725 ccw(c40.34,7.617) 45.215,2.745 46.51,4.04 P1.14
  Bottom Layer w0.5: v1(8.475,16.4) 9.655,16.4 9.657,16.4 ccw(c9.657,18.194) 10.927,16.927 11.141,17.141 ccw(c10.039,18.242) 11.597,18.242 11.597,18.275 U2.14 ; P1.14 TP6.1
NetR10_1: R10.1 U1.9 | length 21.1
  Top Layer w0.5: R10.1@4.302,19.333 3.418,19.333 3.125,19.626 3.125,21.567 cw(c3.629,21.567) 3.273,21.924 3.503,22.154 cw(c3.916,21.74) 3.916,22.325 6.455,22.325 cw(c6.455,19.983) 8.11,21.64 8.113,21.637 9.478,20.272 9.48,20.27 ccw(c11.314,22.104) 11.314,19.51 11.316,19.51 16.269,19.51 16.271,19.51 ccw(c16.271,22.255) v1@18.212,20.314
  Bottom Layer w0.5: v1(18.212,20.361) U1.9@18.212,21.563
NetR12_1: R12.1 U1.10 | length 26.7
  Top Layer w0.5: R12.1@4.302,17.6 4.152,17.6 3.511,17.6 cw(c3.512,18.659) 2.764,17.91 2.709,17.965 cw(c4.022,19.276) 2.167,19.277 2.167,19.281 2.167,21.416 2.167,21.418 cw(c3.791,21.418) 2.644,22.568 3.006,22.93 cw(c4.018,21.921) 4.018,23.35 16.538,23.35 16.541,23.35 cw(c16.54,20.274) 18.712,22.452 cw(c16.753,20.491) 19.522,20.606 cw(c19.023,20.586) 19.485,20.396 v1(19.482,20.389)
  Bottom Layer w0.5: v1(19.482,20.389) U1.10
NetR13_1: R13.1 TP35.1 U1.6 | length 6.4
  Bottom Layer w0.5: TP35.1@16.425,13.9 16.575,14.05 19.891,14.05 20.076,13.865 20.451,13.865 20.601,14.015 20.601,14.651 20.752,14.802 U1.6
NetR19_2: R19.2 R20.2 U2.13 | length 4.2
  Bottom Layer w0.5: U2.13 10.342,18.857 10.342,21.293 R19.2 10.362,21.313 10.362,23.062 R20.2
pads on no net: U2.4 U2.5 U2.9 U2.10 U2.16

## Polygon pours and split planes (outlines as drawn)
GND on Bottom Layer "NONET_L-01_P-001" (solid, shelved, pour order 0): -0.075,0 0,0.075 0,30 60,30 60,0.007
GND on Top Layer "NONET_L-01_P-001" (solid, shelved, pour order 1): -0.075,0 0,0.075 0,30 60,30 60,0.007

## Keep-outs
Keep-Out Layer:
  circle w0.254: c57,3 r1.5
  circle w0.254: c3,27 r1.5
  circle w0.254: c3,3 r1.5
  circle w0.254: c57,27 r1.5
  lines w0.254: 0,3 ccw(c3,3) 3,0 ; 0,3.012 0,27 cw(c3,27) 3,30 ; 2.963,30 57,30 cw(c57,27) 60,27 60,3.05 ; 2.999,0 57,0 ccw(c57,3) 60,3

## Silkscreen, mask and mechanical layers (free items; w line width, h text height)
Top Overlay:
  circle w1: c57,3 r2.2
  circle w1: c57,27 r2.2
  circle w1: c3,3 r2.2
  circle w1: c3,27 r2.2
  text "LO" at 21.492,1.412 h0.8 r90
  text "IS" at 29.126,1.412 h0.8 r90
  text "HO" at 16.422,1.33 h0.8 r90
  text "FB" at 31.645,1.33 h0.8 r90
  text "VS" at 19.01,1.279 h0.8 r90
  text "P1" at 44.446,1.279 h0.8 r90
  text "P2" at 46.986,1.279 h0.8 r90
  text "VC" at 34.185,1.229 h0.8 r90
  text "VE" at 36.771,1.229 h0.8 r90
  text "GND" at 26.644,0.854 h0.8 r90
  text "GND" at 24.102,0.791 h0.8 r90
  text "VCC" at 39.323,0.804 h0.8 r90
  text "GND" at 41.858,0.804 h0.8 r90
  text "VCC" at 13.961,0.727 h0.8 r90